# EAGLE board Copperclad_CooperBuffer_Amp_V0-7 (EAGLE 7.5.0)
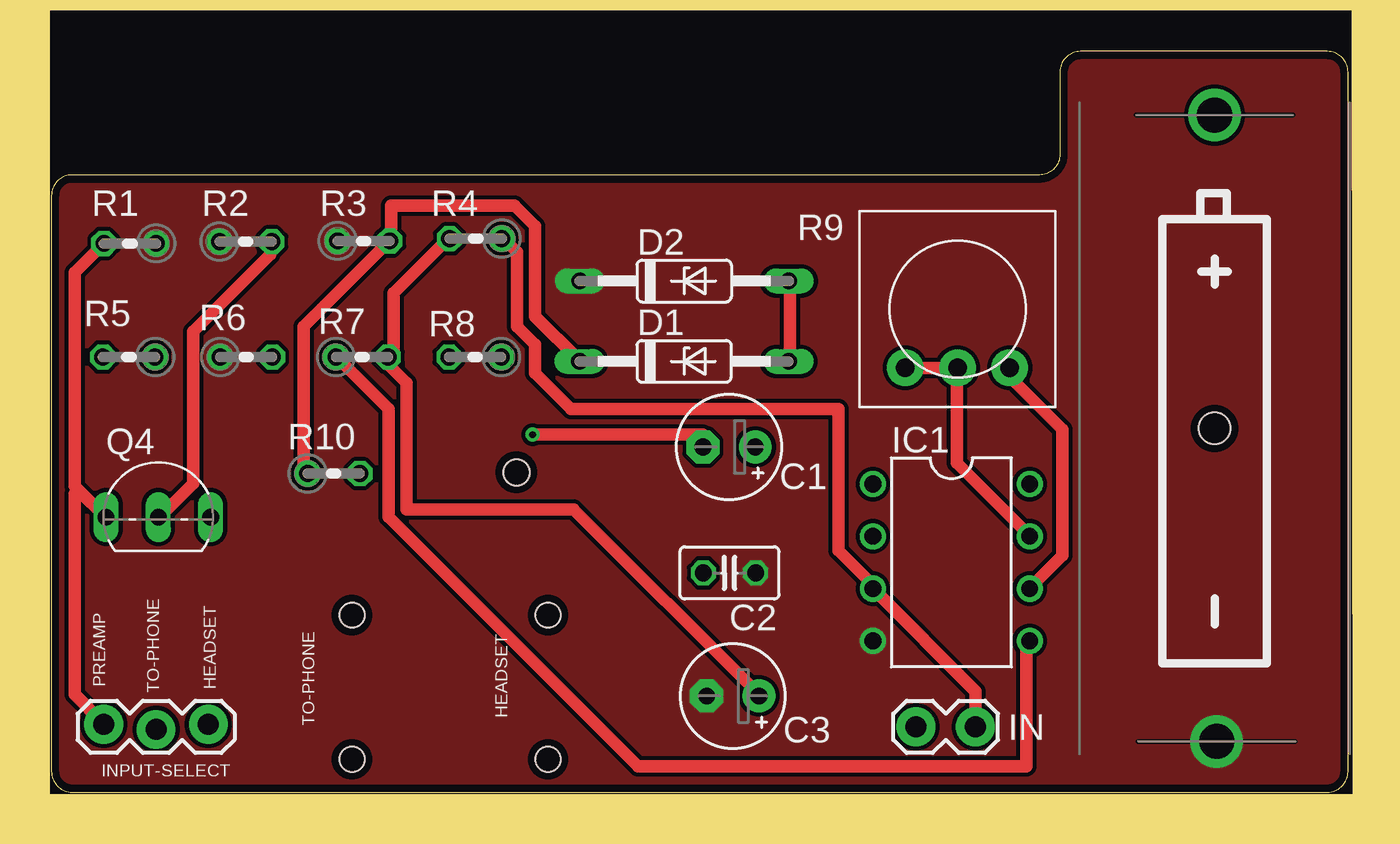
[diagram p0: board, top side]
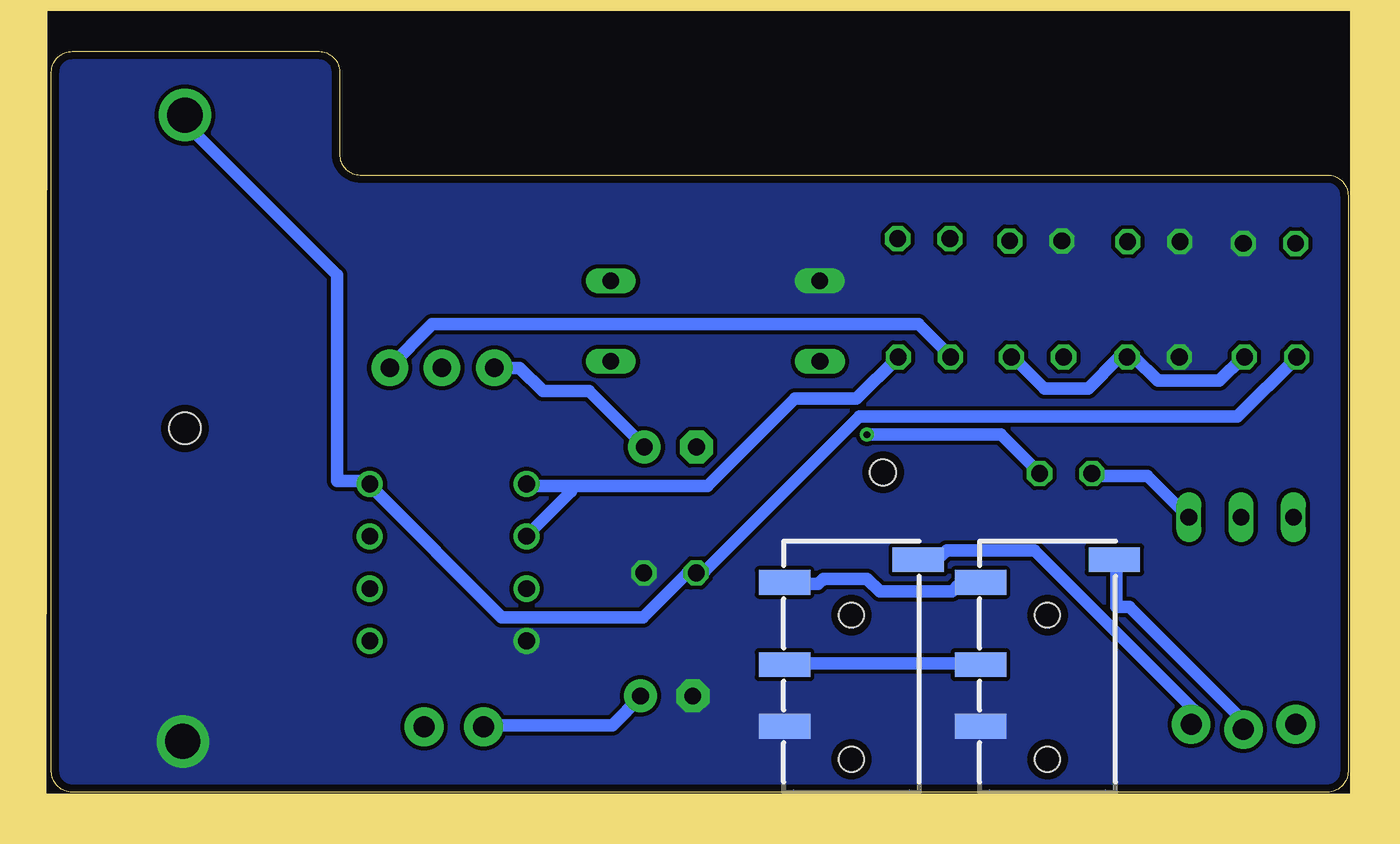
[diagram p1: board, bottom side, seen from below]

Size 63 x 36 mm. Coordinates in mm from the lower left corner, seen from the top.
Outline: 48,30 1,30 arc90 0,29 0,1 arc90 1,0 62,0 arc90 63,1 63,35 arc90 62,36 50,36 arc90 49,35 49,31 arc-90 48,30
Copper layers (1*16): Top 0.0356mm / dielectric 1.5011mm / Bottom 0.0356mm
Design rules "oshpark-2layer": minimum track width 6mil, minimum drill 13mil, track to track 6mil, track to pad 6mil, pad to pad 6mil, via to via 6mil, smd to smd 6mil, copper to edge 15mil, drill to drill 6mil, minimum pad ring 7mil, minimum via ring 7mil, stop-mask expansion 2.5mil, vias tented up to drill 0mil, thermal gap 10mil
Net classes: 0 default: width 0.6 mm, clearance 0.2 mm
Holes 1.25 mm at 22.59,15.54
Milling: 4 lines

## Footprints (pad centres in the part's own frame; a part is rotated, then mirrored left to right if it is on the bottom)
BATTERY-A23 = drill 1.702: GND@1 15.22,0.1; PWR@1 -15.22,0 | hole 1.524: 0,0
E2,5-5 = drill 0.813 pad 1.6: + -1.27,0 | drill 0.813 pad 1.6 octagon: - 1.27,0
C025-025X050 = drill 0.813 octagon: 1 -1.27,0; 2 1.27,0
DO35Z10 = drill 0.813 long: A 5.08,0; C -5.08,0
DIL08 = drill 0.813 pad 1.27: 1 -3.81,-3.81; 2 -1.27,-3.81; 3 1.27,-3.81; 4 3.81,-3.81; 5 3.81,3.81; 6 1.27,3.81; 7 -1.27,3.81; 8 -3.81,3.81
1X02_LOCK = drill 1.016 pad 1.88: 1 -0.178,0; 2 2.718,0
1X03_LOCK = drill 1.016 pad 1.88: 1 0,0.127; 2 2.54,-0.127; 3 5.08,0.127
TO92- = drill 0.813 long: 1 2.54,0; 2 0,0; 3 -2.54,0
0204V = drill 0.813 octagon: 1 -1.27,0; 2 1.27,0
TRIM-3386 = drill 0.9 pad 1.778: 1 -2.54,-2.857; 2 0,-2.857; 3 2.54,-2.857
AUDIO-JACK-TRRS-SMD = smd 1.2 x 2.5: EARTH 11.3,-3.25; RING1 6.2,3.25; RING2 3.2,3.25; TIP 10.2,3.25 | hole 1.2: 1.6,0; 8.6,0

## Placement (x,y rotation side)
BAT1  [BATTERY-A23]  56.52,17.68 270 top
C1  10u  [E2,5-5]  32.92,16.77 180 top
C2  100n  [C025-025X050]  32.95,10.65 180 top
C3  10u  [E2,5-5]  33.1,4.67 180 top
D1  [DO35Z10]  30.74,20.94 0 top
D2  [DO35Z10]  30.75,24.84 0 top
IC1  TLC272  [DIL08]  43.73,11.16 270 top
IN  [1X02_LOCK]  44.72,3.17 180 top
INPUT-SELECT  [1X03_LOCK]  2.54,3.17 0 top
Q4  2N5484  [TO92-]  5.2,13.37 0 top
R1  10K  [0204V]  3.81,26.67 180 top
R2  1.2K  [0204V]  9.44,26.75 0 top
R3  1M  [0204V]  15.17,26.79 0 top
R4  10K  [0204V]  20.61,26.9 180 top
R5  150K  [0204V]  3.77,21.15 180 top
R6  100K  [0204V]  9.46,21.15 0 top
R7  1K  [0204V]  15.09,21.15 0 top
R8  1K  [0204V]  20.59,21.15 180 top
R9  [TRIM-3386]  44.02,23.48 0 top
R10  1K  [0204V]  13.71,15.48 0 top
TO-HEADSET  AUDIO-JACK3  [AUDIO-JACK-TRRS-SMD]  24.13,0 90 bottom
TO-PHONE  AUDIO-JACK3  [AUDIO-JACK-TRRS-SMD]  14.61,0 90 bottom

## Library data of the parts
BAT1 = Daniel
C1-C3 = rcl
D1 D2 = diode
IC1 = linear
IN INPUT-SELECT TO-HEADSET TO-PHONE = SparkFun-Connectors
Q4 = transistor-fet
R1-R8 R10 = resistor
R9 = adafruit

## Nets
`DEL: INPUT-SELECT.1 Q4.3 R1.2
GND: BAT1.GND@1 C2.1 C3.- D2.C IC1.4 R1.1 R2.1 R3.1 R6.1 TO-HEADSET.RING2 TO-PHONE.RING2
N$1: D1.A D2.A
N$3: Q4.2 R2.2
N$5: IC1.5 R7.1
N$6: C1.+ IC1.7 R9.1 R9.2
N$7: IC1.6 R8.2 R9.3
N$8: C3.+ IN.2 R4.2 R5.1 R6.2 R7.2
N$9: IC1.3 IN.1 R4.1
N$10: D1.C Q4.1 R3.2 R10.1
N$11: C1.- R10.2
N$12: INPUT-SELECT.3 TO-HEADSET.EARTH
N$13: TO-HEADSET.TIP TO-PHONE.TIP
N$14: IC1.1 IC1.2 R8.1
N$15: TO-HEADSET.RING1 TO-PHONE.RING1
TO-PHONE: INPUT-SELECT.2 TO-PHONE.EARTH
V9V: BAT1.PWR@1 C2.2 IC1.8 R5.2

## Tracks (layer width: path | path; a pad name or v marks a point on that pad's centre or on a via)
`DEL
  Top 0.6: R1.2 1.12,25.25 1.12,14.88 1.31,14.69 | 1.31,14.69 2.62,13.38 Q4.3 | INPUT-SELECT.1 2.5,3.38 1.12,4.75 1.12,14.5 1.31,14.69
GND
  pour Bottom (no thermals): 0,38 0,1 arc90 1,0 62,0 arc90 63,1 63,38
  pour Top (no thermals): 0,38 0,1 arc90 1,0 62,0 arc90 63,1 63,38
N$1
  Top 0.6: D1.A 35.88,21 35.88,24.75 D2.A
N$3
  Top 0.6: Q4.2 5.25,13.38 6.88,15 6.88,22.38 10.62,26.12 10.62,26.75 R2.2
N$5
  Top 0.6: R7.1 13.88,21.12 16.38,18.62 16.38,13.38 28.5,1.25 47.38,1.25 47.38,7.12 47.5,7.25 IC1.5
N$6
  Top 0.6: IC1.7 47.5,12.5 44,16 44,20.5 R9.2 43.75,20.62 41.5,20.62 R9.1
  Bottom 0.6: C1.+ 34.25,16.88 36.88,19.5 39.12,19.5 40.25,20.62 41.38,20.62 R9.1
N$7
  Top 0.6: IC1.6 47.62,10 49.12,11.5 49.12,17.62 46.62,20.12 46.62,20.5 R9.3
  Bottom 0.6: R8.2 19.38,21.25 20.88,22.75 44.5,22.75 46.62,20.62 R9.3
N$8
  Top 0.6: R4.2 19.25,26.88 16.62,24.25 16.62,21.5 16.38,21.25 R7.2 16.38,20.88 16.38,20.75 17.25,19.88 17.25,13.75 25.38,13.75 34.38,4.75 C3.+
  Bottom 0.6: C3.+ 34.38,4.62 35.75,3.25 42,3.25 IN.2 | R5.1 5.12,21.12 6.25,20 9.25,20 10.38,21.12 10.62,21.12 R6.2 11,21.12 11.12,21.12 12.62,19.62 14.75,19.62 16.25,21.12 R7.2
N$9
  Top 0.6: R4.1 22,26.88 22.62,26.25 22.62,22.62 23.5,21.75 23.5,20.38 25.25,18.62 38.25,18.62 38.25,11.75 39.88,10.12 39.88,10 IC1.3 44.9,4.91 IN.1
N$10
  Top 0.6: R10.1 12.38,15.5 12.38,15.75 12.25,15.88 12.25,22.62 16.38,26.75 R3.2 16.5,27 16.5,28.5 22.5,28.5 23.5,27.5 23.5,23.12 25.62,21 D1.C
  Bottom 0.6: Q4.1 9.75,15.38 12.38,15.38 R10.1
N$11  (via drill 0.33)
  Top 0.6: v23.38,17.38 31.62,17.38 31.62,16.88 C1.-
  Bottom 0.6: R10.2 16.88,17.38 v23.38,17.38
N$12
  Bottom 0.6: TO-HEADSET.EARTH 20.88,11.38 20.75,11.5 19.75,11.5 19.5,11.75 15.25,11.75 7.5,4 7.5,3.38 INPUT-SELECT.3
N$13
  Bottom 0.6: TO-PHONE.TIP 17.88,10.12 18,10 19,10 19.25,9.75 22.75,9.75 23.38,10.38 25.5,10.38 25.75,10.12 27.38,10.12 TO-HEADSET.TIP
N$14
  Bottom 0.6: 37.75,14.88 39.88,14.88 IC1.1 | 37.75,14.88 31.12,14.88 26.88,19.12 23.88,19.12 21.88,21.12 R8.1 | IC1.2 39.88,12.5 37.75,14.62 37.75,14.88
N$15
  Bottom 0.6: TO-PHONE.RING1 17.88,6.25 27.38,6.25 TO-HEADSET.RING1
TO-PHONE
  Bottom 0.6: TO-PHONE.EARTH 11.25,11.25 11.25,9 10.62,9 5.12,3.5 5.12,3.12 INPUT-SELECT.2
V9V
  Bottom 0.6: R5.2 2.5,21.12 5.38,18.25 23.75,18.25 31.25,10.75 31.62,10.75 C2.2 31.88,10.62 32.12,10.62 34.25,8.5 41.12,8.5 47.5,14.88 IC1.8 47.75,15.12 49.12,15.12 49.12,25.12 56,32 56.5,32 56.5,32.88 BAT1.PWR@1

## Text on the board
tNames: PREAMP | TO-PHONE | HEADSET | HEADSET | TO-PHONE